# Altium PCB Analogread_final.PcbDoc
Units mil, origin at the board's own origin, x right, y up, seen from the top; angles counter-clockwise.
Board outline 2895.13 x 3776.59 mil, 2 copper layers (Top Layer, Bottom Layer); 76 components, 63 nets, 266 pads, 54 vias.
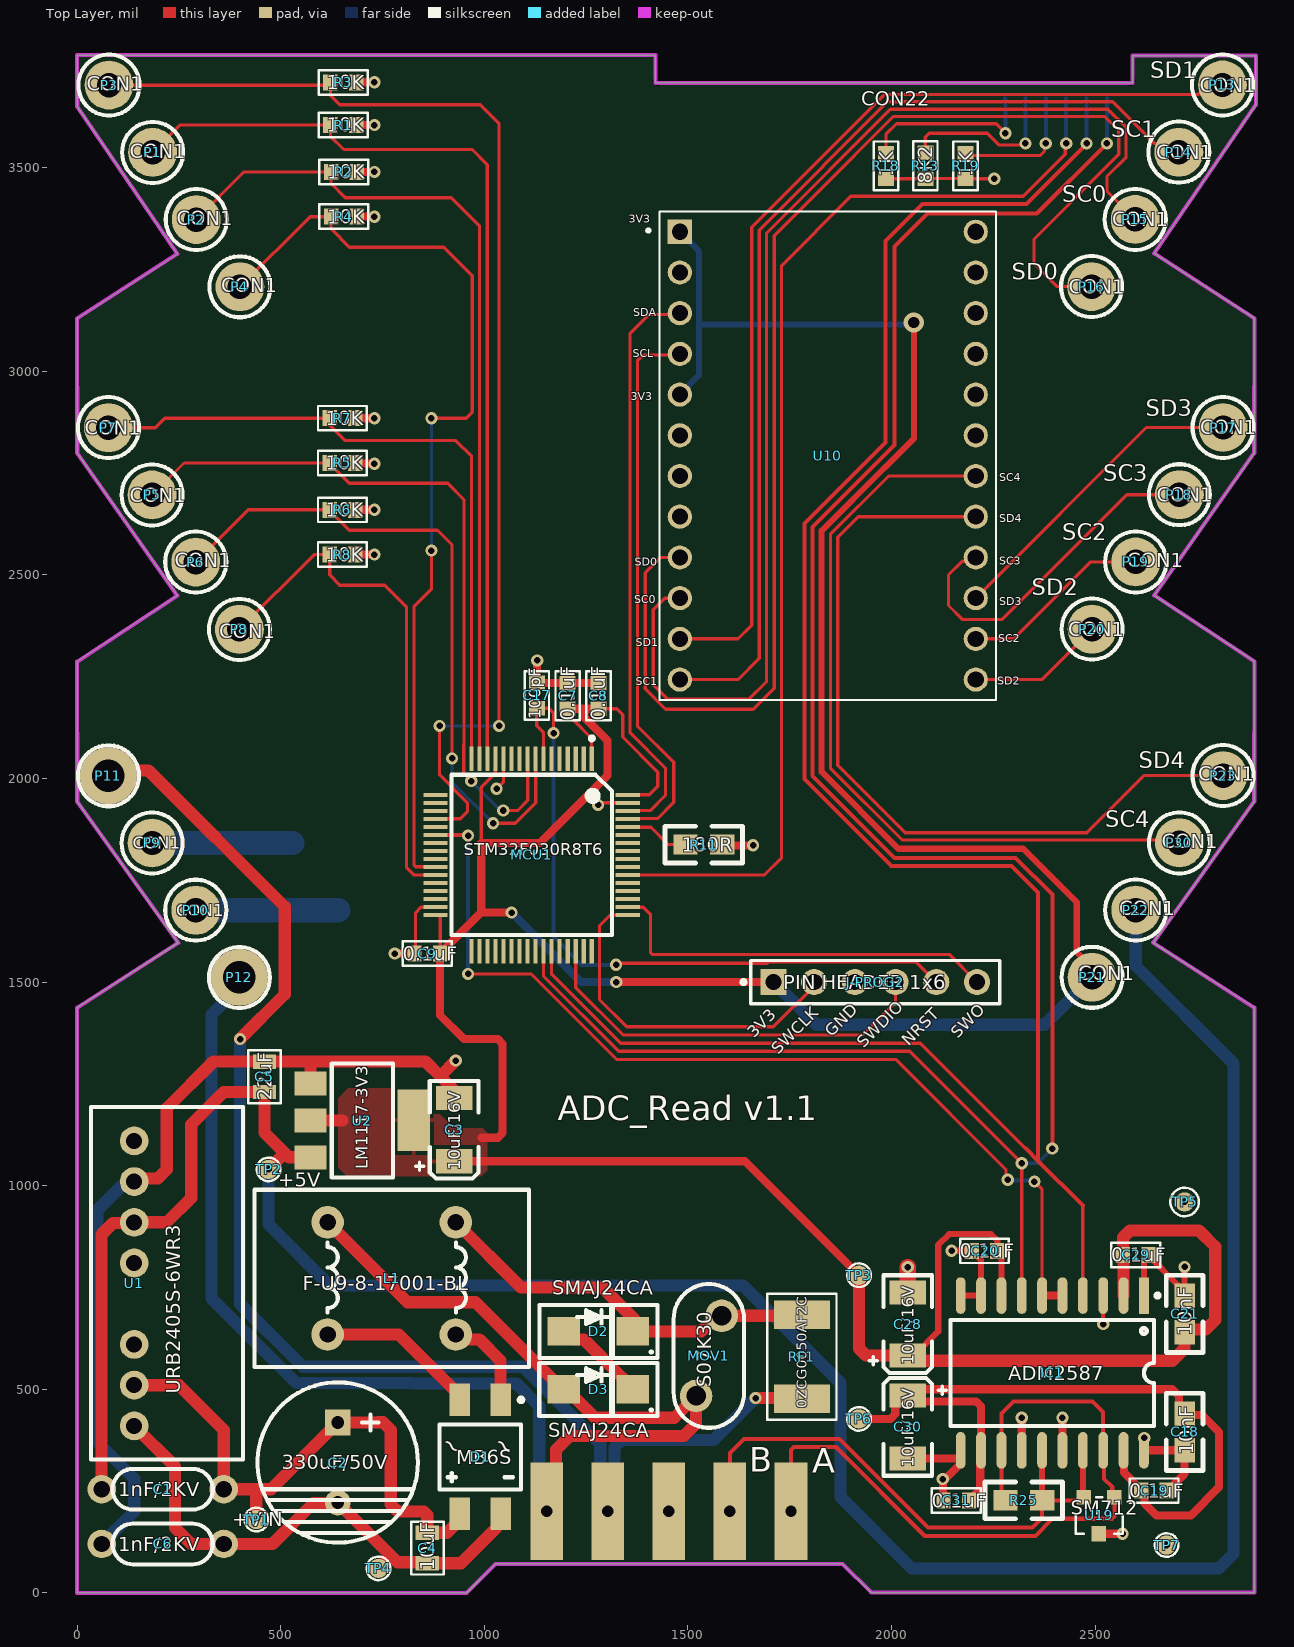
[diagram p0: Top Layer view]
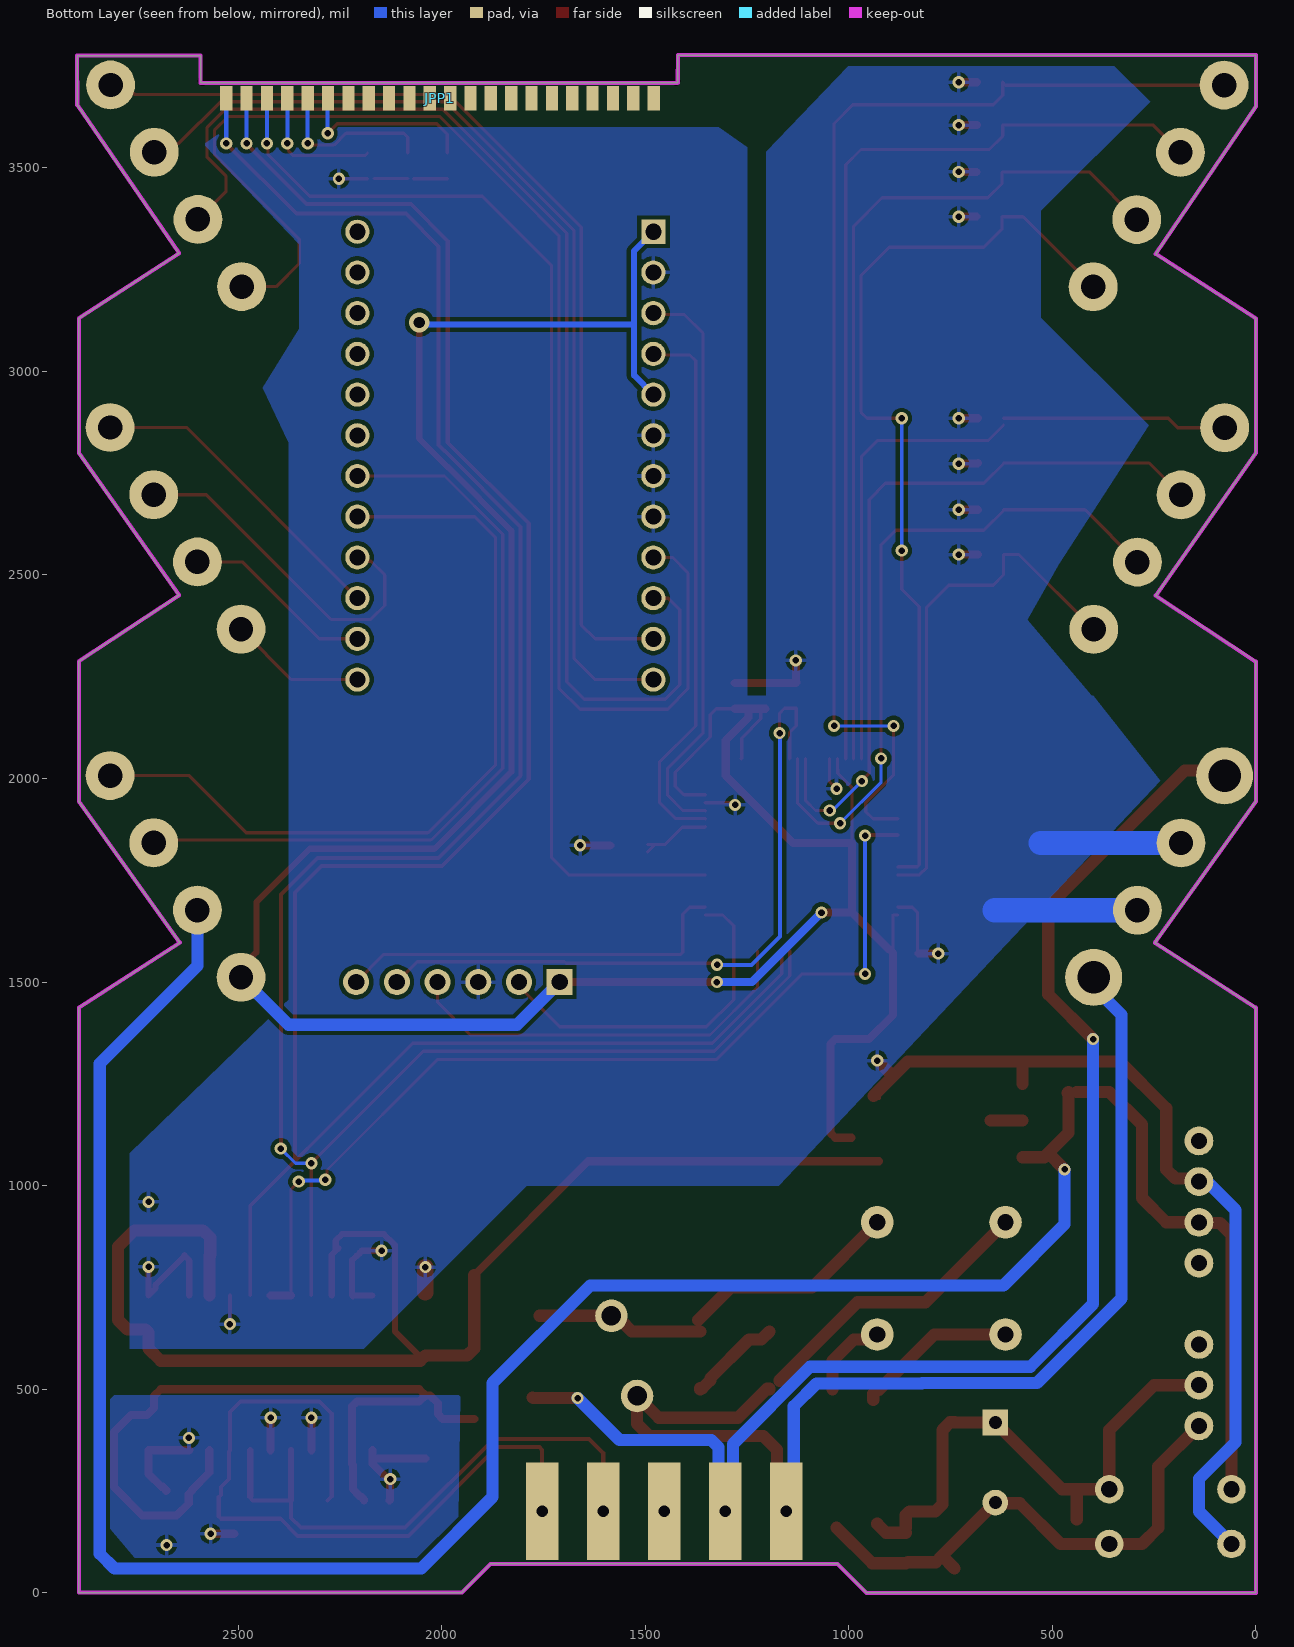
[diagram p1: Bottom Layer view, seen from below]
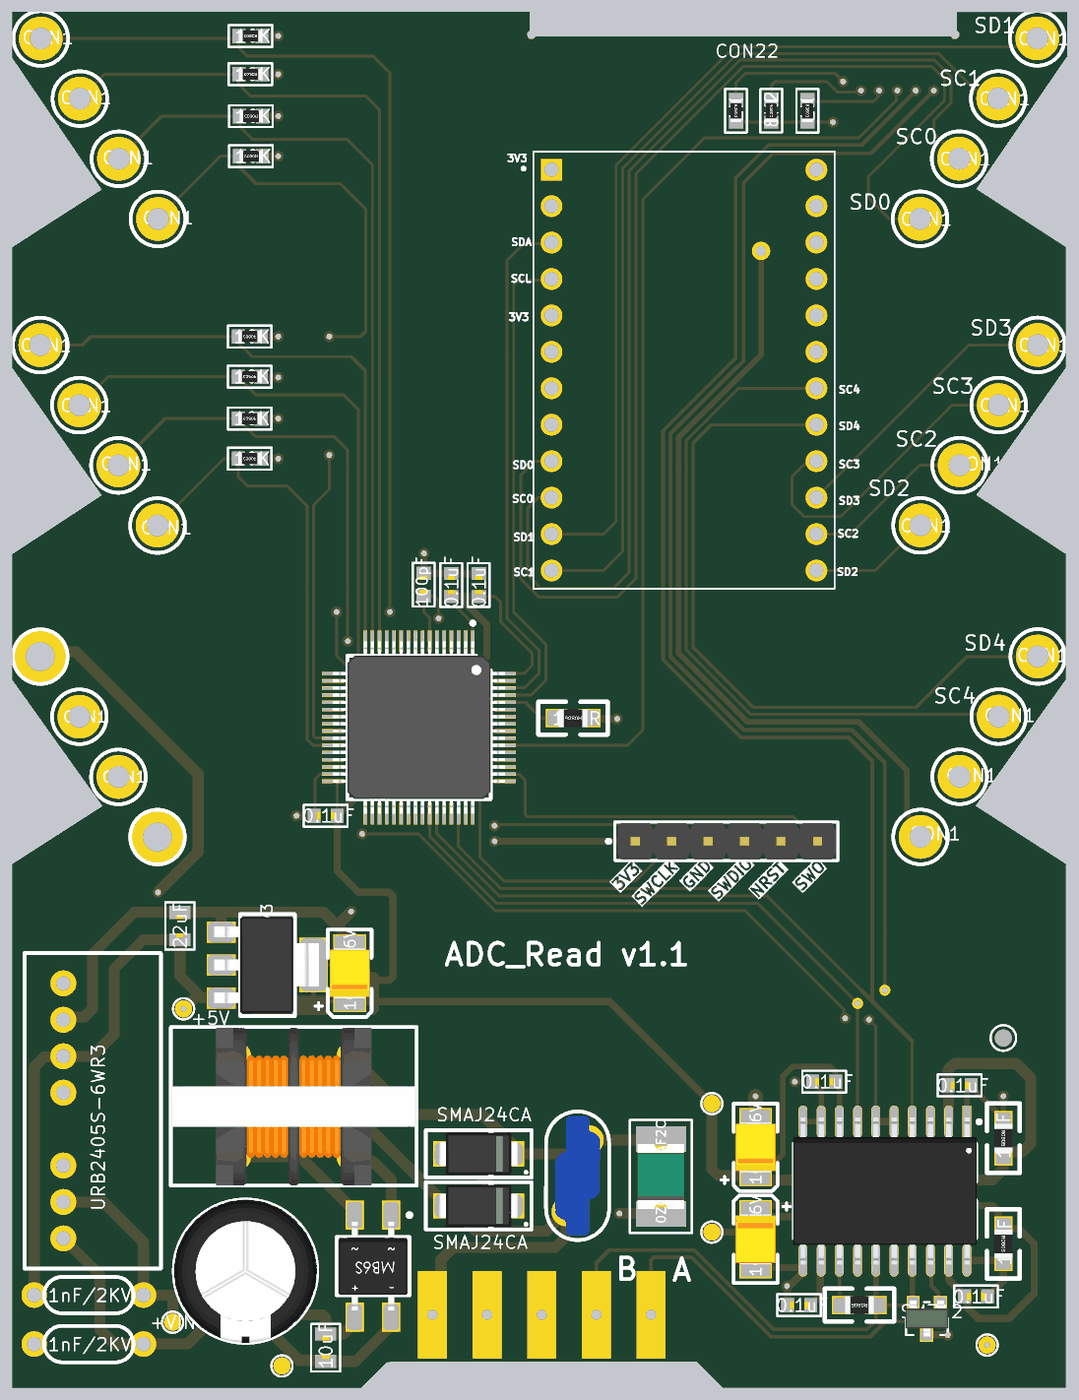
[diagram p2: 3D render of the assembled board from above, using the file's embedded part models]

## Layer stack, top to bottom
Top Solder: solder mask 0.4, Solder Resist, Dk 3.5
Top Layer: signal copper 1.4
Dielectric 1: dielectric 12.6, FR-4, Dk 4.8
Bottom Layer: signal copper 1.4
Bottom Solder: solder mask 0.4, Solder Resist, Dk 3.5

## Board outline
0,0 0,1437.01 248.13,1596.39 0.13,1943.39 0,2287.4 246.13,2449.39 0.13,2799.39 0,3129.92 246.13,3288.39 0.13,3650.39 0,3776.59 1419.95,3776.59 1420.13,3708.39 2592.13,3708.39 2592.13,3775.59 2895.13,3775.59 2895,3654.79 2645,3289.79 2891.13,3130.31 2891,2799.79 2645,2449.79 2891.13,2287.8 2891,1943.79 2643,1596.79 2891.13,1437.4 2891.13,0.39 1950.39,0.39 1879.92,70.87 1027.56,70.87 956.69,0

## Design rules (kind name [scope] priority, off if disabled: settings)
Clearance [All] p1: gap=10 ignorepadtopadclearanceinfootprint=FALSE
PolygonConnect [All] p1: connectstyle=Relief reliefconductorwidth=10 reliefentries=4 polygonreliefangle="90 Angle" airgapwidth=10
RoutingVias [All] p1: holewidth=28 width=50 viastyle="Through Hole" minholewidth=28 minwidth=50 maxholewidth=28 maxwidth=50
SolderMaskExpansion [All] p1: expansion=0 istentingtop=FALSE
SupplyNets "Schematic Supply Nets_4" [InNet('+3V3')] p1: voltage=0.000
SupplyNets "Schematic Supply Nets_3" [InNet('+5V')] p2: voltage=0.000
SupplyNets "Schematic Supply Nets_2" [InNet('GNDISO')] p3: voltage=0.000
SupplyNets "Schematic Supply Nets_1" [InNet('VCCISO')] p4: voltage=0.000
SupplyNets "Schematic Supply Nets" [InNet('GND')] p5: voltage=0.000
Width [All] p1: maxlimit=100 minlimit=5 preferedwidth=10 toplayer_prefwidth=8 minimp=50.000000 maximp=50.000000 favimp=50.000000
30 further rules are at their usual default settings.

## Components (designator, comment, footprint, x,y, rotation, side; value= is the part's Value field where it differs from the comment)
C1 "1nF/2KV" CAPS0.3 360,254.38 r180 top value=?
C2 "330uF/50V" VER-D1000-H1250 640,320 r270 top value=?
C3 "10uF/16V" CAPMP3528 925.93,1137.43 r90 top value=?
C4 "10uF" "CAPC2013 (0805)" 860,110 r90 top value=?
C5 "22uF" "CAPC2013 (0805)" 460,1267.4 r270 top value=?
C6 "1nF/2KV" CAPS0.3 360,120 r180 top value=?
C7 "0.1uF" "CAPC1608 (0603)" 1204.8,2202.99 r90 top
C8 "0.1uF" "CAPC1608 (0603)" 1280,2202.99 r90 top
C9 "0.1uF" "CAPC1608 (0603)" 860,1570 r180 top
C17 "100pF" "CAPC1608 (0603)" 1128.84,2203.98 r270 top
C18 "10nF" 0805 2720,395 r270 top
C19 "0.1uF" "CAPC1608 (0603)" 2645,250.7 r0 top
C20 "0.1uF" "CAPC1608 (0603)" 2228.5,840 r0 top
C21 "10nF" 0805 2720,685 r270 top
C28 "10uF/16V" CAPMP3528 2040,660 r90 top
C29 "0.1uF" "CAPC1608 (0603)" 2600,830 r0 top
C30 "10uF/16V" CAPMP3528 2040,407.5 r270 top
C31 "0.1uF" "CAPC1608 (0603)" 2159.29,226.91 r180 top
D1 "MB6S" MB6S 990,333.87 r270 top
D2 "SMAJ24CA" SMA-(DO-214AC) 1280,642 r180 top
D3 "SMAJ24CA" SMA-(DO-214AC) 1279.86,499.45 r180 top
IC1 "ADM2587" SOIC-20 2395,540 r270 top
J-PROG2 "PIN HEADER 1x6" "PIN-HEADER 2.54 1x6" 1960,1500 r0 top
JPP1 "CON22" JUMPER22 1479.13,3670.39 r0 top
L1 "F-U9-8-17001-BL" BT-1720 772.52,772.2 r180 top
MCU1 "STM32F030R8T6" "QFP64 [10x10]" 1116.22,1812.36 r270 top
MOV1 "S07K30" VARISTER(7MM) 1551.5,581.86 r0 top
P1 "CON1" PAD_B3 185.32,3538 r0 top
P2 "CON1" PAD_B3 292.53,3372.91 r0 top
P3 "CON1" PAD_B3 78.11,3703.09 r0 top
P4 "CON1" PAD_B3 399.75,3207.82 r0 top
P5 "CON1" PAD_B3 183.96,2696.64 r0 top
P6 "CON1" PAD_B3 291.17,2531.55 r0 top
P7 "CON1" PAD_B3 76.75,2861.73 r0 top
P8 "CON1" PAD_B3 398.39,2366.46 r0 top
P9 "CON1" PAD_B3 183.96,1841.64 r0 top
P10 "CON1" PAD_B3 291.17,1676.55 r0 top
P11 "1-PAD THT" PAD-B3 76.75,2006.73 r0 top
P12 "1-PAD THT" PAD-B3 398.39,1511.46 r0 top
P13 "CON1" PAD_B3 2813.02,3703.49 r0 top
P14 "CON1" PAD_B3 2705.81,3538.39 r0 top
P15 "CON1" PAD_B3 2598.6,3373.3 r0 top
P16 "CON1" PAD_B3 2491.39,3208.21 r0 top
P17 "CON1" PAD_B3 2814.38,2862.13 r0 top
P18 "CON1" PAD_B3 2707.17,2697.04 r0 top
P19 "CON1" PAD_B3 2599.96,2531.94 r0 top
P20 "CON1" PAD_B3 2492.75,2366.85 r0 top
P21 "CON1" PAD_B3 2492.75,1511.85 r0 top
P22 "CON1" PAD_B3 2599.96,1676.94 r0 top
P23 "CON1" PAD_B3 2814.38,2007.13 r0 top
P30 "CON1" PAD_B3 2707.17,1842.04 r0 top
R1 "10K" "RESC1608 (0603)" 653.5,3605 r180 top value=?
R2 "10K" "RESC1608 (0603)" 655,3490 r180 top value=?
R3 "10K" "RESC1608 (0603)" 653.5,3710 r180 top value=?
R4 "10K" "RESC1608 (0603)" 655,3380 r180 top value=?
R5 "10K" "RESC1608 (0603)" 651.5,2775 r180 top value=?
R6 "10K" "RESC1608 (0603)" 651.5,2660 r180 top value=?
R7 "10K" "RESC1608 (0603)" 651.5,2885 r180 top value=?
R8 "10K" "RESC1608 (0603)" 651.5,2550 r180 top value=?
R11 "180R" 0805 1539.02,1837.87 r180 top
R13 "8K2" "RESC1608 (0603)" 2083,3505 r270 top
R18 "1K" "RESC1608 (0603)" 1986.32,3504.71 r270 top
R19 "1K" "RESC1608 (0603)" 2182.17,3504.71 r270 top
R25 "" 0805 2325,226.91 r180 top
RF1 "0ZCG0050AF2C" 0ZCGXXXXXXXX 1780,580 r90 top
TP1 "+VIN" TP1-1.2mm#1 440,180 r0 top
TP2 "+5V" TP1-1.2mm#1 470,1040 r90 top
TP3 "+3V3" TP1-1.2mm#1 1920,780 r90 top
TP4 "G_VIN" TP1-1.2mm#1 740,60 r90 top
TP5 "GND" TP1-1.2mm#2 2720,960 r90 top
TP6 "VCCISO" TP1-1.2mm#1 1920,427.18 r90 top
TP7 "GNDISO" TP1-1.2mm#1 2675.51,117.34 r90 top
U1 "URB2405S-6WR3" URBxxxxS-6WR3 220.71,760 r90 top
U2 "LM1117-3V3" SOT-223 700,1160 r270 top
U10 "2717" MODULE_2717 1855,2800 r0 top
U19 "SM712" SOT-23-3 2510,190 r180 top

## Footprints (in the part's own frame and the unit in brackets; to place one, negate y for a bottom-side part, rotate by r counter-clockwise, add the part's x,y. Pads: shape width x height; smd on the part's side, far side on the other; paste and mask are expansions set on the pad)
0ZCGXXXXXXXX [mm]
  rect 1.78x3.5 smd paste-2539.97: 1(-2.615,0) 2(2.615,0)
  silkscreen extent -3.94,-2.16 3.94,2.16, body extent -2.27,-1.62 2.27,1.62, height 0.7
0805 [mil]
  rect 60x50 smd paste-60: 1(-45,0) 2(45,0)
  silkscreen extent -95,-45 95,45, body extent -39,-25 39,25, height 24
BT-1720 [mil]
  round 80 hole 40: 1(-157.48,-137.8) 2(157.48,-137.8) 3(157.48,137.79) 4(-157.48,137.79)
  silkscreen extent -337,-218 338,217, body extent -335,-216 335,217, height 672
"CAPC1608 (0603)" [mm] "Chip Capacitor, 2-Leads, 0603 (1608)"
  rect 0.9x1 smd paste-2539.97: 1(-0.8,0) 2(0.8,0)
  silkscreen extent -1.52,-0.76 1.52,0.76, body extent -0.8,-0.4 0.8,0.4, height 0.45
"CAPC2013 (0805)" [mm] "Chip Capacitor,, 2-Leads, 0805 (2013)"
  rect 0.9x1.45 smd paste-2539.97: 1(-0.95,0) 2(0.95,0)
  silkscreen extent -1.65,-1.02 1.65,1.02, body extent -1,-0.63 1,0.63, height 0.45
CAPMP3528 [mm]
  rect 1.5x2.28 smd paste-0.1: 1(-1.968,0) 2(1.968,0)
  silkscreen extent -3.05,-1.52 3.05,2.41, body extent -1.75,-1.4 1.75,1.4, height 1.91
CAPS0.3 [mil]
  round 70 hole 40: 1(0,0) 2(300,0)
  silkscreen extent 27,-50 273,50
JUMPER22 [mil]
  rect 30x60 smd far side: 1(0,0) 2(50,0) 3(100,0) 4(150,0) 5(200,0) 6(250,0) 7(300,0) 8(350,0) 9(400,0) 10(450,0) 11(500,0) 12(550,0) 13(600,0) 14(650,0) 15(700,0) 16(750,0) 17(800,0) 18(850,0) 19(900,0) 20(950,0) 21(1000,0) 22(1050,0)
MB6S [mil]
  rect 80x50 smd paste-99999: 1(-140,50) 2(-140,-50) 3(140,-50) 4(140,50)
  silkscreen extent -145,-100 80,105, body extent -122,-93 122,93, height 69
MODULE_2717 [mil]
  rect 59.37x59.37 / inner round 59.37 / far side rect 59.37x59.37 hole 39.37: 1(-375,543)
  round 59.37 hole 39.37: 2(-375,443) 3(-375,343) 4(-375,243) 5(-375,143) 6(-375,43) 7(-375,-57) 8(-375,-157) 9(-375,-257) 10(-375,-357) 11(-375,-457) 12(-375,-557) 13(352,-557) 14(352,-457) 15(352,-357) 16(352,-257) 17(352,-157) 18(352,-57) 19(352,43) 20(352,143) 21(352,243) 22(352,343) 23(352,443) 24(352,543)
  silkscreen extent -456,-607 402,593, body extent -425,-607 402,593, height 10
PAD-B3 [mil]
  round 140 hole 80: 1(0,0)
  silkscreen extent -75,-75 75,75
PAD_B3 [mil]
  round 120 hole 60: 1(0,0)
  silkscreen extent -75,-75 75,75
"PIN-HEADER 2.54 1x6" [mil] "Pin Header, pitch 2.54 mm, THT, Vertical, single row, 6p"
  rect 64x64 hole 40: 1(-250,0)
  round 64 hole 40: 2(-150,0) 3(-50,0) 4(50,0) 5(150,0) 6(250,0)
  silkscreen extent -329,-53 306,53, body extent -300,-50 300,50, height 337
"QFP64 [10x10]" [mil]
  rect 60x10 smd paste-99999: 1(-236.22,147.64) 2(-236.22,127.95) 3(-236.22,108.27) 4(-236.22,88.58) 5(-236.22,68.9) 6(-236.22,49.21) 7(-236.22,29.53) 8(-236.22,9.84) 9(-236.22,-9.84) 10(-236.22,-29.53) 11(-236.22,-49.21) 12(-236.22,-68.9) 13(-236.22,-88.58) 14(-236.22,-108.27) 15(-236.22,-127.95) 16(-236.22,-147.64) 33(236.22,-147.64) 34(236.22,-127.95) 35(236.22,-108.27) 36(236.22,-88.58) 37(236.22,-68.9) 38(236.22,-49.21) 39(236.22,-29.53) 40(236.22,-9.84) 41(236.22,9.84) 42(236.22,29.53) 43(236.22,49.21) 44(236.22,68.9) 45(236.22,88.58) 46(236.22,108.27) 47(236.22,127.95) 48(236.22,147.64)
  rect 10x60 smd paste-99999: 17(-147.64,-236.22) 18(-127.95,-236.22) 19(-108.27,-236.22) 20(-88.58,-236.22) 21(-68.9,-236.22) 22(-49.21,-236.22) 23(-29.53,-236.22) 24(-9.84,-236.22) 25(9.84,-236.22) 26(29.53,-236.22) 27(49.21,-236.22) 28(68.9,-236.22) 29(88.58,-236.22) 30(108.27,-236.22) 31(127.95,-236.22) 32(147.64,-236.22) 49(147.64,236.22) 50(127.95,236.22) 51(108.27,236.22) 52(88.58,236.22) 53(68.9,236.22) 54(49.21,236.22) 55(29.53,236.22) 56(9.84,236.22) 57(-9.84,236.22) 58(-29.53,236.22) 59(-49.21,236.22) 60(-68.9,236.22) 61(-88.58,236.22) 62(-108.27,236.22) 63(-127.95,236.22) 64(-147.64,236.22)
  silkscreen extent -291,-197 197,197, body extent -236,-236 236,236, height 63
"RESC1608 (0603)" [mm] "Chip Resistor, 2-Leads, 1608 (0603)"
  rect 0.9x1 smd paste-2539.97: 1(-0.8,0) 2(0.8,0)
  silkscreen extent -1.52,-0.76 1.52,0.76, body extent -0.8,-0.4 0.8,0.4, height 0.45
SMA-(DO-214AC) [mil]
  rect 80x70 smd paste-99999: A(85,0) C(-85,0)
  silkscreen extent -145,-65 145,65, body extent -110,-58 110,58, height 114
SOIC-20 [mil]
  rect 90x24 smd paste-99999: 1(-190,225)
  oval 90x24 smd paste-99999: 2(-190,175) 3(-190,125) 4(-190,75) 5(-190,25) 6(-190,-25) 7(-190,-75) 8(-190,-125) 9(-190,-175) 10(-190,-225) 11(190,-225) 12(190,-175) 13(190,-125) 14(190,-75) 15(190,-25) 16(190,25) 17(190,75) 18(190,125) 19(190,175) 20(190,225)
  silkscreen extent -195,-250 130,263, body extent -203,-252 203,252, height 91
SOT-23-3 [mil]
  rect 36x36 smd paste-99999: 1(-37.5,-45) 2(37.5,-45)
  rect 35.43x37.4 smd paste-99999: 3(0.5,45)
  silkscreen extent -58,-45 58,45, body extent -59,-49 59,49, height 43
SOT-223 [mil]
  rect 59x79 smd paste-99999: 1(-90.55,-126.77) 2(0,-126.77) 3(90.55,-126.77)
  rect 150x79 smd paste-99999: 2(-0.67,126.77)
  silkscreen extent -140,-75 140,75, body extent -132,-145 131,142, height 71
TP1-1.2mm#1 [mm]
  round 1.2 smd paste-2539.97 mask+0: TP(0,0)
  silkscreen extent -0.73,-0.74 0.74,0.74
TP1-1.2mm#2 [mm]
  round 1.2 smd: TP(0,0)
  silkscreen extent -0.89,-0.89 0.89,0.89, body extent -0.6,-0.6 0.6,0.6, height 0.03
URBxxxxS-6WR3 [mm]
  round 1.8 hole 1 paste-2539.97: 1(-8.89,2.05) 2(-6.35,2.05) 3(-3.81,2.05) 5(1.27,2.05) 6(3.81,2.05) 7(6.35,2.05) 8(8.89,2.05)
  silkscreen extent -11,-4.75 11,4.75, body extent -11,-4.75 11,4.75, height 12
VARISTER(7MM) [mil]
  round 80 hole 48: 1(31.5,98.42) 2(-31.5,-98.43)
  silkscreen extent -87,-176 87,176, body extent -61,-163 61,163, height 360
VER-D1000-H1250 [mm] "Vertical assembly, 10mm diameter, 12.5mm height"
  rect 1.6x1.6 hole 0.8 paste-2539.97: 1(-2.5,0)
  round 1.6 hole 0.8 paste-2539.97: 2(2.5,0)
  silkscreen extent -5,-5 5,5, body extent -5,-5 5,5, height 12.5

## Part data
C1 C6: library part "CAP 0.3\" (THD)", "CAP CER, ?F, ?V, ?, THT 0.3\"", Capacitance=?, Package=0603, ComponentLink1Description=Supplier, ComponentLink1URL=?
C2: library part "CAP ELEC D10 (THD)", "Aluminum Electrolytic Capacitor (Radial), / ?uF, ?V, Diameter 10mm", Capacitance=?, ComponentLink1Description=Supplier, ComponentLink1URL=?
C3: library part "CAP TANTALUM (SMD)", "CAP TANTALUM, ?uF, ?V, 1411", Capacitance=?, ComponentLink1Description=Supplier, ComponentLink1URL=?
C4 C5: library part "CAP CHIP 0805 (SMD)", "CAP CER, ?F, ?V, ±?%, 2013 (0805)", Capacitance=?, Package=0805, ComponentLink1Description=Supplier, ComponentLink1URL=?
C7 C8 C9 C18 C19 C20 C21 C29 C31: library part CAP, "Capacitor"
C17: library part Cap, "Capacitor", LatestRevisionDate=17-Jul-2002, LatestRevisionNote="Re-released for DXP Platform.", PackageDescription="Radial Cap, Thru-Hole; 2 Leads; 0.3 in Pin Spacing", PackageReference=RAD-0.3, Published=8-Jun-2000, Publisher="Altium Limited"
C28 C30: library part "CAPACITOR POL", "Capacitor"
D2 D3: library part "DIODE TVS BI-DIR"
IC1: library part ADM2582E, "Transceiver with ±15 kV ESD Protection"
MCU1: "Value-line ARM-based 32-bit MCU with 64KB Flash, timers, ADC, communication interfaces, 2.4-3.6 V operation"
MOV1: library part "Varistor D7", "Disc Varistor 7mm"
P1 P2 P3 P4 P5 P6 P7 P8 P9 P10 P13 P14 P15 P16 P17 P18 P19 P20 P21 P22 P23 P30: "Connector"
R1 R2 R3 R4 R5 R6 R7 R8: library part "RES CHIP 0603 (SMD)", "Chip Resistor, ? Ohm, +/-?%, ?W, 1608 (0603)", Package=0603, Resistance=?, ComponentLink1Description=Supplier, ComponentLink1URL=?
R11: library part Res3, "Resistor", LatestRevisionDate=29-May-2009, LatestRevisionNote="IPC-7351 Footprint Added.", PackageDescription="Chip Resistor", PackageReference=J1-0603, Published=8-Jun-2000, Publisher="Altium Limited"
R13 R18 R19 R25: library part RES1
RF1: "Polymeric PTC Resettable Fuse 30V 500 mA Ih Surface Mount 1812 (4532 Metric), Concave"
TP1 TP2 TP3 TP4 TP5 TP6 TP7: library part TP, "TEST PAD"
U1: "6W, Regulated, Isolated, DC to DC Converter, / 24V to 5V@1200mA"
U2: "Low-Dropout Linear Regulator 800 mA"
U10: "Module: multiplexer; I2C interface multiplexer; TCA9548A; 3Ã·5VDC", Package=None, Check_prices=https://www.snapeda.com/parts/2717/Adafruit+Industries/view-part/?ref=eda, MF=Adafruit, MP=2717, SnapEDA_Link=https://www.snapeda.com/parts/2717/Adafruit+Industries/view-part/?ref=snap
U19: Part Field 1=Suppressor, Part Field 2="Asymmetrical TVS Diode for RS485", Part Field 3=1, Part Field 4=SOT-23, Part Field 5=SEMTECH, Part Field 6=SM712TCT, Part Field 7="Serial Micro."

## Free pads (board coordinates)
  round 10 hole 24: 1(1425.13,3713.39) 1(2587.13,3713.39)
  rect 80x240 hole 28: 25(1153.13,200.39) 26(1303.13,200.39) 27(1453.13,200.39) 28(1603.13,200.39) 29(1753.13,200.39)

## Via types
v1: diameter 30, hole 16, Top Layer to Bottom Layer, tented both sides, 51 vias
v2: diameter 30, hole 16, Top Layer to Bottom Layer, 2 vias
v3: diameter 50, hole 28, Top Layer to Bottom Layer, 1 vias

## Nets (pads, with @x,y where several pads share a name; then routed paths per layer and width w, separated by ;. In a path a pad name is that pad's centre, name@x,y a point inside that pad or via, vN(x,y) a via of type N, cw(c..) or ccw(c..) an arc to the next point about the centre after c; other vN are vias at no path point)
"485 - A": IC1.13 IC1.18 pad.29 R25.2 U19.1 | length 1816
  Top Layer w10: pad.29 1753.13,351.2 1760,358.07 1863.65,358.07 2081.72,140 2354.09,140 2396,181.91 2541.64,181.91 2547.5,187.77 U19.1 2542.29,240.21 2542.29,260 2522.29,280 2522.29,347.71 IC1.18 2520,443.71 2493.71,470 2300,470 2270,440 IC1.13 2270,236.91 R25.2
"485 - B": IC1.15 IC1.17 pad.28 R25.1 U19.2 | length 1412.1
  Top Layer w10: pad.28 1603.13,343.13 1638.07,378.07 1871.93,378.07 2090,160 2345.81,160 2370,184.19 R25.1 2464.41,226.91 U19.2 U19.2@2470,237.5
  Top Layer w15: R25.1 IC1.15 ; U19.2@2470,237.5 IC1.17
+3V3: C3.1 C7.1 C8.1 C9.1 C20.2 C21.2 C28.1 C29.1 IC1.2 IC1.8 J-PROG2.1 MCU1.1 MCU1.13 MCU1.32 MCU1.64 P21.1 TP3.TP U2.2 U10.1 U10.5 | length 10689.1
  Top Layer w8: MCU1.32 890.5,1664.72 891.5,1663.72 891.5,1571.97 C9.1 ; 992.28,1841.89 992.28,1978.11 1026.95,2012.78 1026.95,2022.58 1027.64,2023.27 MCU1.13 ; C7.1 1215.98,2160.33 1215.98,2146.47 1263.17,2099.27 1263.17,2049.27 MCU1.1 ; C8.1 1325.29,2171.5 1340,2156.78 1340,2102.02 1426.22,2015.8 1426.22,1981.22 1405,1960 MCU1.64
  Top Layer w15: v3(2055,3120) 2055,2834.91 1984.59,2764.5 1984.09,2764.5 1828.5,2608.91 1828.5,2016.09 2017.09,1827.5 2323.71,1827.5 2455,1696.21 2455,1573.14 2492.75,1535.39 P21.1 ; C28.1@2055.35,582.5 2115,642.15 2115,854.53 2141.69,881.21 2244.42,881.21 2260,865.63 C20.2 ; C20.2@2253.2,846.8 C20.2 ; IC1.8 2270,830 C20.2
  Top Layer w20: C9.1 891.5,1418.46 949.95,1360 1033.28,1360 1045,1348.28 1045,1129.46 1033.28,1117.75 992.93,1117.75 ; C9.1@891.5,1571.97 899.21,1579.69 901.18,1579.69 992.28,1670.79 ; C3.1 1640.07,1059.93 TP3.TP ; v1(1067.01,1670.79) 992.28,1670.79 ; C7.1 1250,2171.5 ; C8.1 1250,2171.5 ; v1(1323.73,1500) J-PROG2.1 ; 992.28,1670.79 992.28,1841.89 1136.6,1841.89 1302.36,2007.65 1302.36,2093.59 1246.18,2149.77 1246.18,2167.68 1250,2171.5
  Top Layer w30: U2.2@573.23,1160 651.43,1160 ; TP3.TP 1920,600.07 1937.57,582.5 C28.1 2052.5,570 2690,570 2720,600 C21.2 2726.82,646.82 2771.82,646.82 2795,670 2795,850 2755,890 2586.08,890 2568.5,872.43 C29.1 ; IC1.2 C29.1@2570,828.5
  Bottom Layer w15: U10.5 1527.19,2990.19 1527.19,3114.97 ; U10.1 1527.19,3295.81 1527.19,3114.97 ; v3(2055,3120) 2049.97,3114.97 1527.19,3114.97
  Bottom Layer w20: v1(1067.01,1670.79) 1237.8,1500 v1(1323.73,1500)
  Bottom Layer w30: J-PROG2.1 1815,1395 2375.9,1395 P21.1
+5V: C1.2 C5.2 P22.1 TP2.TP U1.6 U2.3 | length 6266.7
  Top Layer w30: C1.2 60,880 88.13,908.13 138.13,908.13 U1.6 220,910 280,970 280,1150 360,1230 C5.2@440,1230 ; C5.2 462.72,1227.28 460,1220 460,1130 510,1080 ; v1(470,1040) 510,1080 ; U2.3 572.68,1070 520,1070 510,1080
  Bottom Layer w30: v1(470,1040) 470,905 620,755 1635,755 1875,515 1875,235 2050,60 2803.85,60 2840,96.15 2840,1300 2599.96,1540.04 P22.1
A_LDR_0: MCU1.14 P1.1 R1.2 | length 2365.2
  Top Layer w8: P1.1 252.32,3605 R1.2 622.01,3577.99 655,3545 970,3545 1007.27,3507.73 1007.27,2049.27 MCU1.14
A_LDR_1: MCU1.15 P2.1 R2.2 | length 2124.3
  Top Layer w8: P2.1 409.63,3490 R2.2 623.5,3461.5 658.46,3426.54 918.46,3426.54 988.27,3356.73 MCU1.15
A_LDR_2: MCU1.20 P3.1 R3.2 | length 2972.1
  Top Layer w8: P3.1 615.1,3703.09 R3.2 622.01,3677.99 645,3655 990,3655 1036.27,3608.73 v1(1036.27,2129.26) ; MCU1.20 940.53,1900.95 958.43,1918.84 958.43,1940.89 890,2009.31 v1(890,2129.26)
  Bottom Layer w8: v1(890,2129.26) v1(1036.27,2129.26)
A_LDR_3: MCU1.26 P4.1 R4.2 | length 2330.9
  Top Layer w8: P4.1 571.93,3380 R4.2 623.5,3350 668.5,3305 900.27,3305 970.27,3235 970.27,2900 955.27,2885 v1(870,2885) ; v1(870,2560) 870,2465 826.94,2421.94 826.94,1788.21 831.62,1783.52 879.31,1783.52 MCU1.26
  Bottom Layer w8: v1(870,2560) v1(870,2885)
A_LDR_4: MCU1.9 P5.1 R5.2 | length 1815.3
  Top Layer w8: P5.1 262.32,2775 R5.2 ; R5.2@620,2773.03 668.03,2725 910,2725 950,2685 950,2084.8 949.58,2084.38 949.58,2012.78 967.75,1994.61 v1(967.75,1993.58) ; v1(1046.5,1921.45) 1081.74,1921.45 1106.38,1946.09 MCU1.9
  Bottom Layer w8: v1(967.75,1993.58) 1035.68,1925.66 1042.29,1925.66 v1(1046.5,1921.45)
A_LDR_5: MCU1.8 P6.1 R6.2 | length 1677
  Top Layer w8: P6.1 419.63,2660 R6.2 ; R6.2@620,2658.03 668.03,2610 885,2610 920.58,2574.42 v1(920.58,2049.27) ; v1(1021.54,1890.2) 1021.74,1890 1075.75,1890 1126.06,1940.32 MCU1.8
  Bottom Layer w8: v1(920.58,2049.27) 920.58,1991.15 v1(1021.54,1890.2)
A_LDR_6: MCU1.16 P7.1 R7.2 | length 1676
  Top Layer w8: P7.1 191.73,2861.73 215,2885 R7.2 ; R7.2@620,2868.03 658.03,2830 930,2830 968.58,2791.42 MCU1.16
A_LDR_7: MCU1.27 P8.1 R8.2 | length 1287.9
  Top Layer w8: P8.1 581.93,2550 R8.2 620,2500 645,2475 755,2475 808.94,2421.06 808.94,1780.75 826.54,1763.15 MCU1.27
GND: C3.2 C5.1 C6.2 C7.2 C8.2 C9.2 C17.1 C20.1 C21.1 C28.2 C29.2 IC1.1 IC1.3 IC1.9 IC1.10 J-PROG2.3 MCU1.12 MCU1.31 MCU1.63 P9.1 P10.1 R1.1 R2.1 R3.1 R4.1 R5.1 R6.1 R7.1 R8.1 R11.1 R13.2 R18.2 R19.2 TP5.TP U1.7 U2.1 U10.2 U10.6 U10.7 U10.8 | length 4795.4
  Top Layer w8: C9.2@831.01,1570 831.01,1670.53 844.2,1683.72 879.31,1683.72 MCU1.31 ; v1(1030.13,1974.94) 1047.32,1992.14 MCU1.12 ; v1(1279.3,1935.1) 1285.26,1935.1 1290.48,1940.32 MCU1.63 ; R11.1 R11.1@1586.02,1835.87 ; R18.2 R13.2@2069.32,3473.21 ; R13.2 R19.2@2166,3473.5 ; R19.2 v1(2252.32,3473.21)
  Top Layer w10: C3.2 935.5,1224.5 C3.2@939.59,1228.6 ; v1(2520,660) IC1.3
  Top Layer w15: v1(2147.5,840) 2196.75,840 2201.25,835.5 2201.25,833.79 2207.22,827.81 2208.94,827.81 2220,816.75 IC1.9 ; IC1.10 2216.56,730 IC1.9@2218.28,728.28 ; IC1.1 2620,816.54 C29.2@2631.5,828.03 ; C29.2 C29.2@2631.5,828.03 ; v1(2720,800.47) C21.1 2702.5,747.5 2702.5,757.03 C29.2@2631.5,828.03
  Top Layer w20: R8.1 v1(730,2550) ; R6.1 v1(730,2660) ; R5.1 683.98,2774.02 729.02,2774.02 v1(730,2773.03) ; R7.1 v1(730,2885) ; R1.1 v1(730,3605) ; R3.1 v1(730,3710) ; R4.1 v1(730,3380) ; R2.1 v1(730,3490) ; v1(780,1570) C9.2 ; v1(1130,2290) 1129.42,2289.42 1129.42,2236.05 C17.1 1129.33,2234.98 1204.31,2234.98 C7.2 C8.2 ; R11.1@1586.02,1835.87 v1(1660,1835.87)
  Top Layer w30: U1.7 147.82,1017.82 197.82,1017.82 220,1040 220,1190 334.8,1304.8 C5.1 569.64,1304.8 ; U2.1 573.23,1301.21 569.64,1304.8 ; v1(930,1307.09) 891.45,1268.55 ; C3.2@939.59,1220.41 935.5,1224.5 891.45,1268.55 ; 569.64,1304.8 855.2,1304.8 891.45,1268.55
  Top Layer w40: C28.2 v1(2040,800)
  Bottom Layer w10: U10.2@1476.17,3231 1480,3234.83 U10.2@1480,3240
  Bottom Layer w30: C6.2 140,200 140,280 50,370 50,940 120,1010 U1.7
  Bottom Layer w60: P9.1 528.36,1841.64 ; P10.1 641.55,1676.55
  other v1: 2720,960
GNDISO: C18.2 C19.2 C30.2 C31.2 IC1.11 IC1.14 IC1.16 IC1.20 TP7.TP U19.3 | length 732.2
  Top Layer w20: C30.2 2168.15,330 2170,331.85 IC1.11 2170,317 2134.26,281.26 2128,281.26 v1(2126.09,279.35) 2126.94,278.49 2126.94,227.76 C31.2 ; IC1.14 v1(2320,430) ; IC1.16 v1(2420,430) ; U19.3 v1(2567.5,145) ; IC1.20 C18.2 2720,292.24 2688.15,260.39 2684.21,260.39 2676.5,252.67 C19.2
  other v1: 2675.51,117.34 2620.6,380.36
I2C1_SCL: MCU1.61 U10.4 | length 1360.6
  Top Layer w8: MCU1.61 1353.13,1901.63 1425.31,1901.63 1465,1941.32 1465,2040 1376,2129 1376,3026 1390,3040 U10.4@1480,3040
I2C1_SDA: MCU1.62 U10.3 | length 1420.1
  Top Layer w8: MCU1.62 1353.13,1921.32 1407.22,1921.32 1445,1959.1 1445,2025.26 1358,2112.26 1358,3093.31 1404.69,3140 U10.3@1480,3140
L1: JPP1.16
L2: JPP1.15
L3: JPP1.14
L4: JPP1.13
L5: JPP1.12
L6: JPP1.11
L7: JPP1.10
L8: JPP1.9
L9: JPP1.8
L10: JPP1.7
L11: JPP1.6
L12: JPP1.5
L13: JPP1.4
L14: JPP1.3
L15: JPP1.2
L16: JPP1.1
LED_STAT: JPP1.20 MCU1.54 | length 2798.1
  Top Layer w8: MCU1.54 1688.15,1763.15 1730,1805 1730,3260 1900,3430 2323.68,3430 2426.68,3533 2426.68,3557.54 v1(2429.13,3560)
  Bottom Layer w10: v1(2429.13,3560) JPP1.20
NetC1_1: C1.1 C2.1 C4.2 D1.3 TP1.TP U1.2 | length 1356.9
  Top Layer w30: U1.2 250,510 360,400 C1.1@360,260 ; C1.1 440,254.38 ; TP1.TP 440,254.38 ; C2.1@640,410 631.57,410 475.96,254.38 440,254.38 ; C2.1 738.43,418.43 738.79,418.79 751.21,418.79 770,400 770,217.57 787.57,200 851.21,200 860,191.21 C4.2@860,160 ; C4.2 908.54,147.4 930,168.87 D1.3@930,170
NetC2_2: C2.2 C4.1 C6.1 D1.4 TP4.TP U1.1 | length 1243.6
  Top Layer w30: U1.1 240,310 240,160 280,120 C6.1@350,120 ; C6.1 480,120 580,220 C2.2@620,220 ; C2.2 770.79,90.79 786.46,75.12 C4.1@854.88,75.12 ; TP4.TP 770,90 ; C4.1 942.6,72.6 D1.4@1030,160
NetD1_1: D1.1 L1.4 | length 206.7
  Top Layer w30: L1.4 942.44,621.97 988.03,621.97 1040,570 D1.1@1040,500
NetD1_2: D1.2 L1.3 | length 400.2
  Top Layer w30: L1.3 789.99,634.41 925.53,498.87 930,498.87 940,488.87 D1.2
NetD2_A: D2.A D3.C | length 233.4
  Top Layer w30: D2.A 1215,622 1245,622 1340,527 1340,522 1359.81,502.19 1364.81,502.19 D3.C
NetD2_C: D2.C L1.1 MOV1.1 RF1.2 | length 943.1
  Top Layer w15: RF1.2@1759.71,680.29 RF1.2@1760,680
  Top Layer w30: L1.1 1090,750 1290,750 D2.C@1370,670 ; D2.C 1532.89,642 1560.89,670 MOV1.1@1580,670 ; MOV1.1 RF1.2@1759.71,680.29
NetMCU1_60: MCU1.60 R11.2 | length 181.7
  Top Layer w8: MCU1.60 1353.13,1880.57 1409.31,1880.57 1452.01,1837.87 R11.2 ; R11.2@1478.35,1835.87 R11.2@1494.02,1820.2
NetP13_1: P13.1 U10.11 | length 2469.2
  Top Layer w8: U10.11 1623,2343 1657,2377 1657,3354.53 1982.47,3680 2752.34,3680 2754.4,3682.06 2791.59,3682.06 P13.1
NetP14_1: P14.1 U10.12 | length 2481.1
  Top Layer w8: U10.12 1623,2243 1675,2295 1675,3347.07 1989.93,3662 2543,3662 2645.18,3559.82 2684.38,3559.82 P14.1
NetP15_1: P15.1 U10.10 | length 2975.7
  Top Layer w8: U10.10 1443,2443 1415,2415 1415,2230 1450.54,2194.46 1649.46,2194.46 1693,2238 1693,3339.62 1997.38,3644 2531.46,3644 2576.13,3599.32 2576.13,3525.68 2529.39,3478.93 2529.39,3442.51 P15.1
NetP16_1: P16.1 U10.9 | length 3415.7
  Top Layer w8: U10.9 1433,2543 1395,2505 1395,2220 1445,2170 1660,2170 1712,2222 1712,3333.16 1814.9,3436.06 2004.84,3626 2524,3626 2558.13,3591.87 2558.13,3533.13 2350,3325 2350,3265 2406.79,3208.21 P16.1
NetP17_1: P17.1 U10.15 | length 781
  Top Layer w8: U10.15 2626.13,2862.13 P17.1
NetP18_1: P18.1 U10.16 | length 867.9
  Top Layer w8: U10.16 2197.52,2533.52 2173.52,2533.52 2140,2500 2140,2425 2174.13,2390.87 2272.07,2390.87 2578.23,2697.04 P18.1
NetP19_1: P19.1 U10.14 | length 471.2
  Top Layer w8: U10.14 2300.81,2343 2489.75,2531.94 P19.1
NetP20_1: P20.1 U10.13 | length 337
  Top Layer w8: U10.13 2368.9,2243 P20.1
NetP23_1: P23.1 U10.17 | length 1992.9
  Top Layer w8: U10.17 1918.46,2643 1868,2592.54 1868,2032.46 2033.46,1867 2480,1867 2620.13,2007.13 P23.1
NetP30_1: P30.1 U10.18 | length 1924.2
  Top Layer w8: U10.18 1993,2743 1850,2600 1850,2025 2026,1849 2700.21,1849 P30.1
NRST: C17.2 J-PROG2.5 MCU1.7 | length 1718
  Top Layer w8: MCU1.7 1145.06,2049.27 1145.06,2113.19 1128.84,2129.41 C17.2 1157.85,2172.48 1170.04,2160.3 v1(1170.04,2111.57) ; v1(1323.43,1542.34) 1327.08,1546 1694.52,1546 1698.52,1550 2060,1550 J-PROG2.5
  Bottom Layer w10: v1@1169.45,2110.58 1169.45,1611.56 1238.67,1542.34 v1(1323.43,1542.34)
R_RX: JPP1.19 R19.1 | length 331.5
  Top Layer w8: R19.1 2188.37,3530 2364.78,3530 2375.86,3541.09 2375.86,3556.73 v1(2379.13,3560)
  Bottom Layer w10: v1(2379.13,3560) JPP1.19
R_STAT: JPP1.18 R13.1 | length 412.9
  Top Layer w8: R13.1 2083,3575.03 2092.76,3584.79 2235.21,3584.79 2264.21,3555.79 2324.92,3555.79 v1(2329.13,3560)
  Bottom Layer w10: v1(2329.13,3560) JPP1.18
R_TX: JPP1.17 R18.1 | length 445.8
  Top Layer w8: R18.1 1986.32,3582.03 2012.29,3608 2256.79,3608 v1(2280,3584.79)
  Bottom Layer w10: JPP1.17 2280,3669.53 v1(2280,3584.79)
SupplyIN_A: P11.1 pad.26 RF1.1 | length 3474.5
  Top Layer w15: RF1.1@1777.05,480 RF1.1
  Top Layer w30: P11.1 90.01,2020 175,2020 510,1685 510,1470 v1(400,1360) ; v1(1666.13,478.18) 1775.23,478.18 RF1.1@1777.05,480
  Bottom Layer w30: v1(400,1360) 400,709.41 554.41,555 1095,555 1284.61,365.39 1284.61,218.92 pad.26 1320,217.26 1320,357.43 1337.57,375 1562.95,375 v1(1666.13,478.18)
SupplyIN_B: D3.A L1.2 MOV1.2 P12.1 pad.25 | length 3693.3
  Top Layer w30: L1.2 811.51,713.53 978.47,713.53 1170,522 D3.A@1170,520 ; pad.25 1176.01,223.27 1176.01,351.15 1209.86,385 1490,385 1520,415 MOV1.2 1466.56,430 1272,430 1200,502 1195,502 D3.A
  Bottom Layer w30: P12.1 398.39,1488.39 330,1420 330,722.84 537.84,515 820,515 820.78,514.22 1079.22,514.22 1135,458.43 1135,218.53 pad.25
SWCLK: J-PROG2.2 MCU1.49 | length 868.2
  Top Layer w8: MCU1.49 1309.06,1664.72 1282.86,1638.53 1282.86,1457.14 1350,1390 1710,1390 1810,1490 J-PROG2.2
SWDIO: J-PROG2.4 MCU1.46 | length 1006.6
  Top Layer w8: MCU1.46 1224.49,1486.42 1340.91,1370 1930,1370 2010,1450 J-PROG2.4
SWO: J-PROG2.6 MCU1.50 | length 988.9
  Top Layer w8: MCU1.50 1353.13,1683.72 1390.77,1683.72 1408,1666.49 1408,1572.69 1412.69,1568 2142,1568 J-PROG2.6
UART1_CS: IC1.5 IC1.6 MCU1.22 | length 2376.9
  Top Layer w8: v1(960,1520) 1114.54,1520 1324.54,1310 2010,1310 2281.55,1038.45 2281.55,1018.48 v1(2285.76,1014.27) ; v1(2351.24,1010.11) 2351.24,1009.45 2370,990.69 IC1.6 ; IC1.5 IC1.5@2422.95,732.95
  Top Layer w10: MCU1.22 958.43,1861.57 v1(960,1860)
  Top Layer w20: IC1.6 IC1.5
  Bottom Layer w10: v1(960,1520) v1(960,1860) ; v1(2285.76,1014.27) 2287.84,1012.19 2343.74,1012.19 2345.83,1010.11 v1(2351.24,1010.11)
UART1_RX: IC1.4 JPP1.21 MCU1.43 | length 5275.3
  Top Layer w8: MCU1.43 1164.75,1575.46 1164.75,1520.71 1335.46,1350 2071.01,1350 2330,1091.01 ; IC1.4 2470,951.01
  Top Layer w10: 2330,1091.01 2360,1061.01 ; 2470,951.01 2360,1061.01 ; v1(2479.13,3560) 2479.13,3558.59 2331.55,3411 2075.7,3411 1985.09,3320.38 1985.09,2825.6 1786,2626.51 1786,1998.49 1999.49,1785 2295.13,1785 2360,1720.13 2360,1061.01
  Bottom Layer w10: v1(2479.13,3560) JPP1.21
UART1_TX: IC1.7 JPP1.22 MCU1.42 | length 5283.6
  Top Layer w8: MCU1.42@1146.43,1576.83 MCU1.42 1145.06,1575.46 1145.06,1514.94 1330,1330 2045,1330 v2(2320,1055) IC1.7
  Top Layer w10: v2@2395,1105 2395,1715 2305,1805 2007.77,1805 1806,2006.77 1806,2618.23 1992.27,2804.5 1992.77,2804.5 2007.25,2818.98 2007.25,3306.9 2088.03,3387.69 2356.82,3387.69 v1(2529.13,3560)
  Bottom Layer w8: v2(2320,1055) 2358.99,1055 v2(2395,1091.01)
  Bottom Layer w10: v1(2529.13,3560) JPP1.22
VCCISO: C18.1 C19.1 C30.1 C31.1 IC1.12 IC1.19 TP6.TP | length 1939
  Top Layer w20: TP6.TP 1997.55,427.19 2009.26,438.9 2009.26,465.47 2028.79,485 C30.1 ; C31.1 2190.79,228.88 2198.5,236.59 2200.47,236.59 2218.15,254.27 2218.15,314.07 2220,315.92 IC1.12 2220.02,458.28 2208.3,470 2055,470 C30.1 ; IC1.19 2570.77,349.23 2570.77,295.41 2613.5,252.67 C19.1 2621.22,242.98 2621.22,219.69 2650.91,190 2735.31,190 2804.67,259.36 2804.67,395.33 2763.28,436.72 2723.28,436.72 2706.29,453.71 2706.29,483.71 2690,500 2055,500 C30.1
pads on no net: MCU1.2 MCU1.3 MCU1.4 MCU1.5 MCU1.6 MCU1.10 MCU1.11 MCU1.17 MCU1.18 MCU1.19 MCU1.21 MCU1.23 MCU1.24 MCU1.25 MCU1.28 MCU1.29 MCU1.30 MCU1.33 MCU1.34 MCU1.35 MCU1.36 MCU1.37 MCU1.38 MCU1.39 MCU1.40 MCU1.41 MCU1.44 MCU1.45 MCU1.47 MCU1.48 MCU1.51 MCU1.52 MCU1.53 MCU1.55 MCU1.56 MCU1.57 MCU1.58 MCU1.59 U1.3 U1.5 U1.8 U10.19 U10.20 U10.21 U10.22 U10.23 U10.24

## Polygon pours and split planes (outlines as drawn)
GND on Bottom Layer "GND_L02_P003" (solid, pour order 3): 1250,3550 1319.84,3600 2524.74,3600 2583.65,3557.54 2350,3312.17 2350,3105.13 2439.84,2960 2375,2824.55 2375,2096.42 1250,2096.42
GND on Bottom Layer "GND_L02_P004" (solid, pour order 4): 259.98,3662.46 347.52,3750 1001.55,3750 1202.91,3540 1202.91,3526.38 1202.91,2200.49 400,2200.49 561.69,2390 484.6,2526.54 263.65,2867.37 528.36,3132.08 528.36,3394.08
GND on Bottom Layer "GND_L02_P005" (solid, pour order 5): 400,2202.98 2375,2202.98 2375,1457.02 2766.01,1079.58 2766.01,599.99 2191.14,599.99 1791.14,999.99 1172.35,999.99 235,1995
GNDISO on Bottom Layer "GNDISO_L02_P000" (solid, remove dead copper, pour order 0): 2821.32,165 2739.99,69.68 2049.99,69.68 1959.29,149.68 1954.76,485 2804.67,485 2821.32,468.35
+3V3 on Top Layer "NONET_L-01_P-001" (solid, pour order 1): 640.93,1043.93 640.93,1214.93 664.93,1238.93 827.93,1238.93 925.93,1140.93 995.93,1140.93 1007.07,1129.78 1007.07,1037.07 992.93,1022.93 661.93,1022.93

## Keep-outs
Keep-Out Layer:
  lines w10: 1877.95,70.87 1027.56,70.87 956.69,0 0,0 0,1437.01 248.13,1596.39 0.13,1943.39 0,2287.4 246.13,2449.39 0.13,2799.39 0,3129.92 246.13,3288.39 0.13,3650.39 0,3776.59 1419.95,3776.59 1420.13,3708.39 2592.13,3708.39 2592.13,3775.59 2895.13,3775.59 2895,3654.79 2645,3289.79 2891.13,3130.32 2891,2799.79 2645,2449.79 2891.13,2287.8 2891,1943.79 2643,1596.79 2891.13,1437.4 2891.13,0.39 1950.39,0.39 1879.92,70.87

## Other copper
Top Layer:

## Silkscreen, mask and mechanical layers (free items; w line width, h text height)
Top Overlay:
  text "SD1" at 2635,3720 h40
  text "SC1" at 2540,3575 h40
  text "SC0" at 2420,3415 h40
  text "3V3" at 1355,3365 h20
  text "SD0" at 2295,3225 h40
  text "SDA" at 1365.99,3134.89 h20
  text "SCL" at 1365.09,3034.62 h20
  text "3V3" at 1359.37,2929.24 h20
  text "SD3" at 2625,2890 h40
  text "SC4" at 2265,2730 h20
  text "SC3" at 2520,2730 h40
  text "SD4" at 2265,2630 h20
  text "SC2" at 2420,2585 h40
  text "SC3" at 2265,2525 h20
  text "SD0" at 1369.67,2523.19 h20
  text "SD2" at 2345,2450 h40
  text "SC0" at 1368.62,2430.54 h20
  text "SD3" at 2265,2425 h20
  text "SC2" at 2261.77,2335 h20
  text "SD1" at 1371.94,2325.15 h20
  text "SD2" at 2260,2230 h20
  text "SC1" at 1372.42,2229.03 h20
  text "SD4" at 2607.87,2025 h40
  text "SC4" at 2525,1880 h40
  text "GND" at 1853.83,1363.7 h30 r45
  text "3V3" at 1663.22,1360.71 h30 r45
  text "SWO" at 2163.21,1359.45 h30 r45
  text "NRST" at 2041.92,1340.71 h30 r45
  text "SWDIO" at 1932.51,1336.06 h30 r45
  text "SWCLK" at 1721.92,1320.71 h30 r45
  text "ADC_Read v1.1" at 1180,1160.92 h60
  text "B" at 1650.13,297.41 h60
  text "A" at 1805.13,294.91 h60
Mechanical 1:
Top 3D Body:
  region: 514.58,3196.35 107.13,3800.41 -31.43,3706.95 376.01,3102.88
  region: 513.26,2358.63 105.81,2962.69 -32.75,2869.23 374.69,2265.17
  rectangle: 1100,70.87 1820,333.87
  rectangle: 1396.54,3616.38 2593.94,3707.2
  region: 513.26,1503.63 105.81,2107.69 -32.75,2014.23 374.69,1410.17
  region: 2515.08,3106.92 2922.53,3710.98 2783.96,3804.45 2376.52,3200.38
  region: 2518.43,1406.54 2925.88,2010.6 2787.31,2104.06 2379.87,1500
  region: 2516.44,2265.56 2923.89,2869.62 2785.32,2963.09 2377.88,2359.02

## Text inside footprints (layer, text, board x,y; h text height)
D1: Top Overlay "~" at 1020,363.87 h40 r315; Top Overlay "~" at 890,363.86 h40 r315